# EAGLE board SensorBoard (EAGLE 9.3.0)
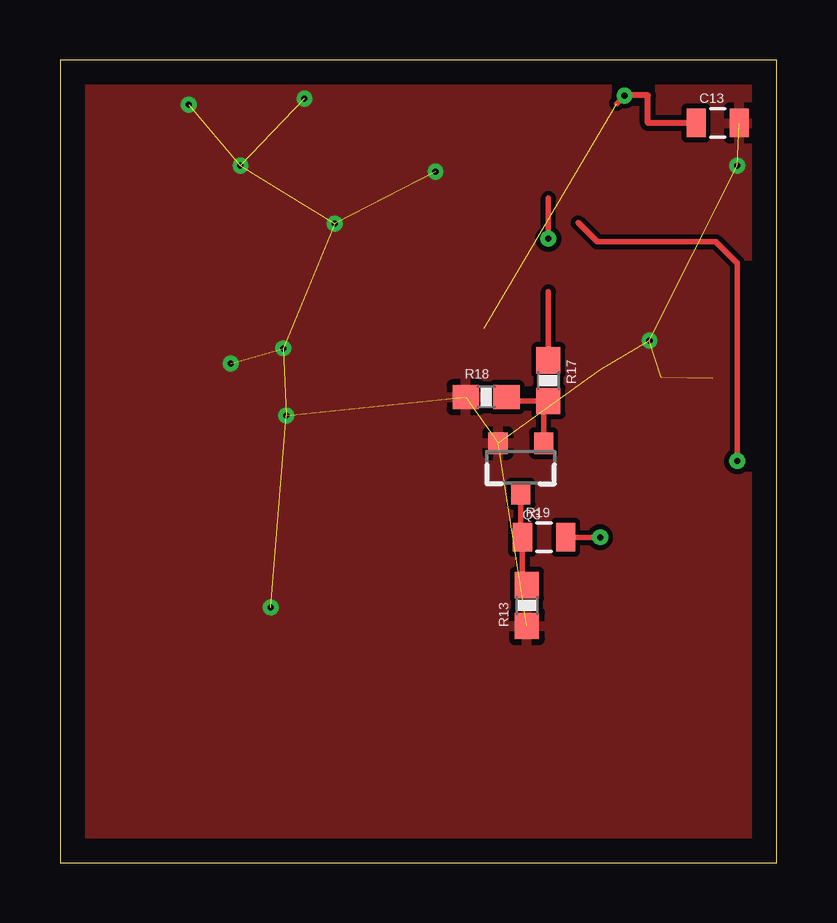
[diagram p0: board, top side]
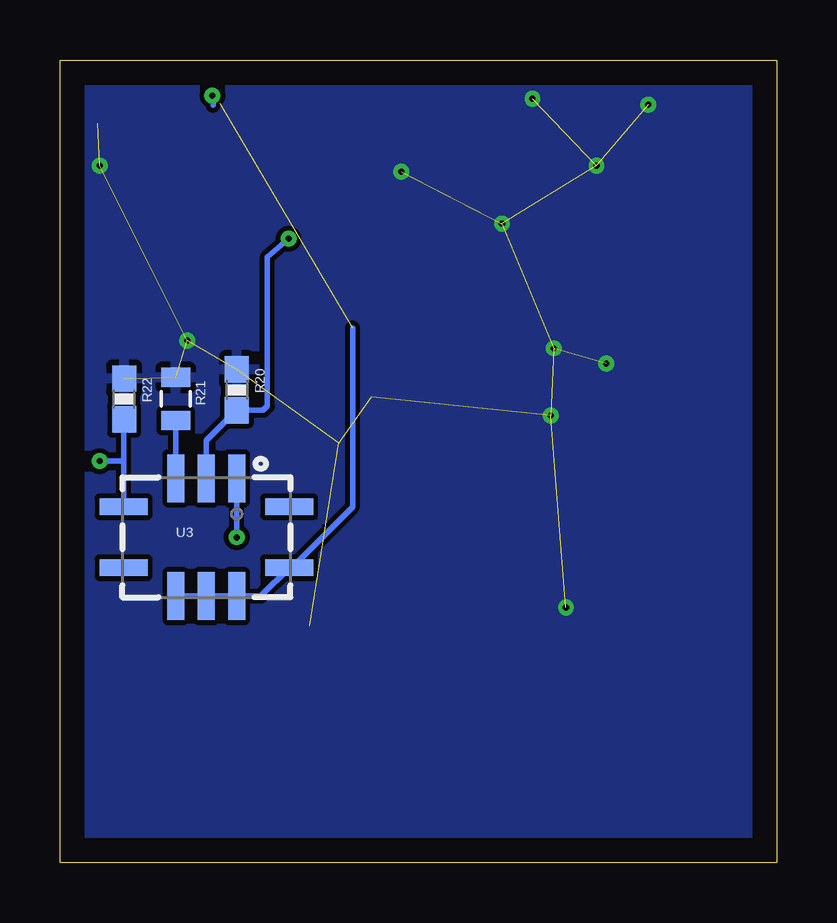
[diagram p1: board, bottom side, seen from below]

Size 29.87 x 33.46 mm. Coordinates in mm from the lower left corner, seen from the top.
Outline: 0,33.47 0,0 29.87,0 29.87,33.47 0,33.47
Copper layers (1*16): Top 0.035mm / dielectric 1.5mm / Bottom 0.035mm
Design rules "default": minimum track width 10mil, minimum drill 24mil, track to track 8mil, track to pad 8mil, pad to pad 8mil, via to via 8mil, smd to smd 8mil, copper to edge 40mil, drill to drill 8mil, minimum pad ring 10mil, minimum via ring 8mil, stop-mask expansion 4mil, vias tented up to drill 0mil, thermal gap 10mil

## Footprints (pad centres in the part's own frame; a part is rotated, then mirrored left to right if it is on the bottom)
0805 = smd 0.8 x 1.2: 1 -0.9,0; 2 0.9,0
SOT23-3 = smd 0.8 x 0.9: 1 -0.95,-1; 2 0.95,-1; 3 0,1.1
0603-RES = smd 1.1 x 1: 1 -0.85,0; 2 0.85,0
MICS_10-SMD = smd 0.7 x 2: A 1.27,2.45; B 0,2.45; C -1.27,2.45; F -1.27,-2.45; G 0,-2.45; H 1.27,-2.45 | smd 2 x 0.7: D -3.45,1.27; E -3.45,-1.27; J 3.45,-1.27; K 3.45,1.27

## Placement (x,y rotation side)
C13  10uF  [0805]  27.41,30.84 0 top
Q3  MOSFET-NCHANNELBSS138  [SOT23-3]  19.2,16.49 180 top
R13  51  [0603-RES]  19.46,10.72 90 top
R17  100  [0603-RES]  20.34,20.09 270 top
R18  100k  [0603-RES]  17.75,19.41 0 top
R19  82  [0805]  20.17,13.57 0 top
R20  22K  [0603-RES]  22.5,19.71 270 bottom
R21  82  [0805]  25.04,19.33 270 bottom
R22  47K  [0603-RES]  27.2,19.33 270 bottom
U3  MICS-4514  [MICS_10-SMD]  23.77,13.57 0 bottom

## Library data of the parts
C13 = SparkFun-Capacitors; PROD_ID: CAP-11330
Q3 = SparkFun-DiscreteSemi; PROD_ID: TRANS-00830; P_NAME: BSS138
R13 = SparkFun-Resistors; PROD_ID: RES-12314
R17 = SparkFun-Resistors; PROD_ID: RES-07863
R18 = SparkFun-Resistors; PROD_ID: RES-07828
R19 R21 = SparkFun-Resistors; DK_ID: 541-82.0CCT-ND
R20 = SparkFun-Resistors; PROD_ID: RES-07853
R22 = SparkFun-Resistors; PROD_ID: RES-07871
U3 = SparkFun-Sensors; PROD_ID: COMP-12310

## Nets
3V3: C13.1 U3.F U3.G U3.H U3.J
GND: C13.2 Q3.2 R13.1 R18.1 R20.1 R21.1 R22.1
N$7: Q3.3 R13.2 R19.1
N$13: Q3.1 R17.2 R18.2
N$15: R19.2 U3.A
N$16: R21.2 U3.C
PRE: R17.1
VNOX: R20.2 U3.B
VRED: R22.2 U3.D

## Tracks (layer width: path | path; a pad name or v marks a point on that pad's centre or on a via)
3V3  (via drill 0.25)  (1 unrouted)
  Top 0.229: 26.67,30.68 C13.1 | 23.19,31.65 v23.52,31.98
  Top 0.254: C13.1 24.5,30.84 24.5,31.99 v23.52,31.99 v23.52,31.98
  Bottom 0.229: 23.49,31.57 v23.52,31.98 | U3.F U3.G U3.H 21.5,11.12 U3.J 20.22,12.3 17.68,14.84 17.68,22.29
GND  (via drill 0.25)  (17 unrouted)
  other vias: 9.42,18.65 8.79,10.65 9.3,21.44 15.65,28.81 10.19,31.85 7.52,29.06 11.46,26.65 28.22,29.06 5.36,31.6 24.56,21.77 7.11,20.8
  pour Top: -8.38,37.44 34.54,37.44 34.54,-4.44 -8.36,-4.44
  pour Bottom: -4.04,34.65 32.41,34.65 32.41,-2.44 -4.04,-2.44
N$7
  Top 0.229: Q3.3 19.2,13.63 R19.1 19.27,11.76 R13.2
N$13
  Top 0.229: Q3.1 20.15,19.05 R17.2 18.77,19.24 R18.2
N$15  (via drill 0.25)
  Top 0.229: R19.2 v22.5,13.57
  Bottom 0.229: v22.5,13.57 U3.A
N$16
  Bottom 0.229: U3.C R21.2
PRE
  Top 0.229: R17.1 20.35,23.8
VNOX  (via drill 0.25)
  Top 0.229: v20.35,26.01 20.35,27.7
  Bottom 0.229: U3.B 23.77,17.59 R20.2 21.4,18.86 21.23,19.03 21.23,25.25 v20.35,26.01
VRED  (via drill 0.25)
  Top 0.229: 21.59,26.67 22.38,25.89 27.33,25.89 28.22,25 v28.22,16.74
  Bottom 0.229: U3.D 27.22,16.74 | 27.22,16.74 27.22,18.46 R22.2 | v28.22,16.74 27.22,16.74